# EAGLE board Gambar teknik relay_Rizqulloh faathir akmal Yuliandi_21507334006 (EAGLE 9.6.2)
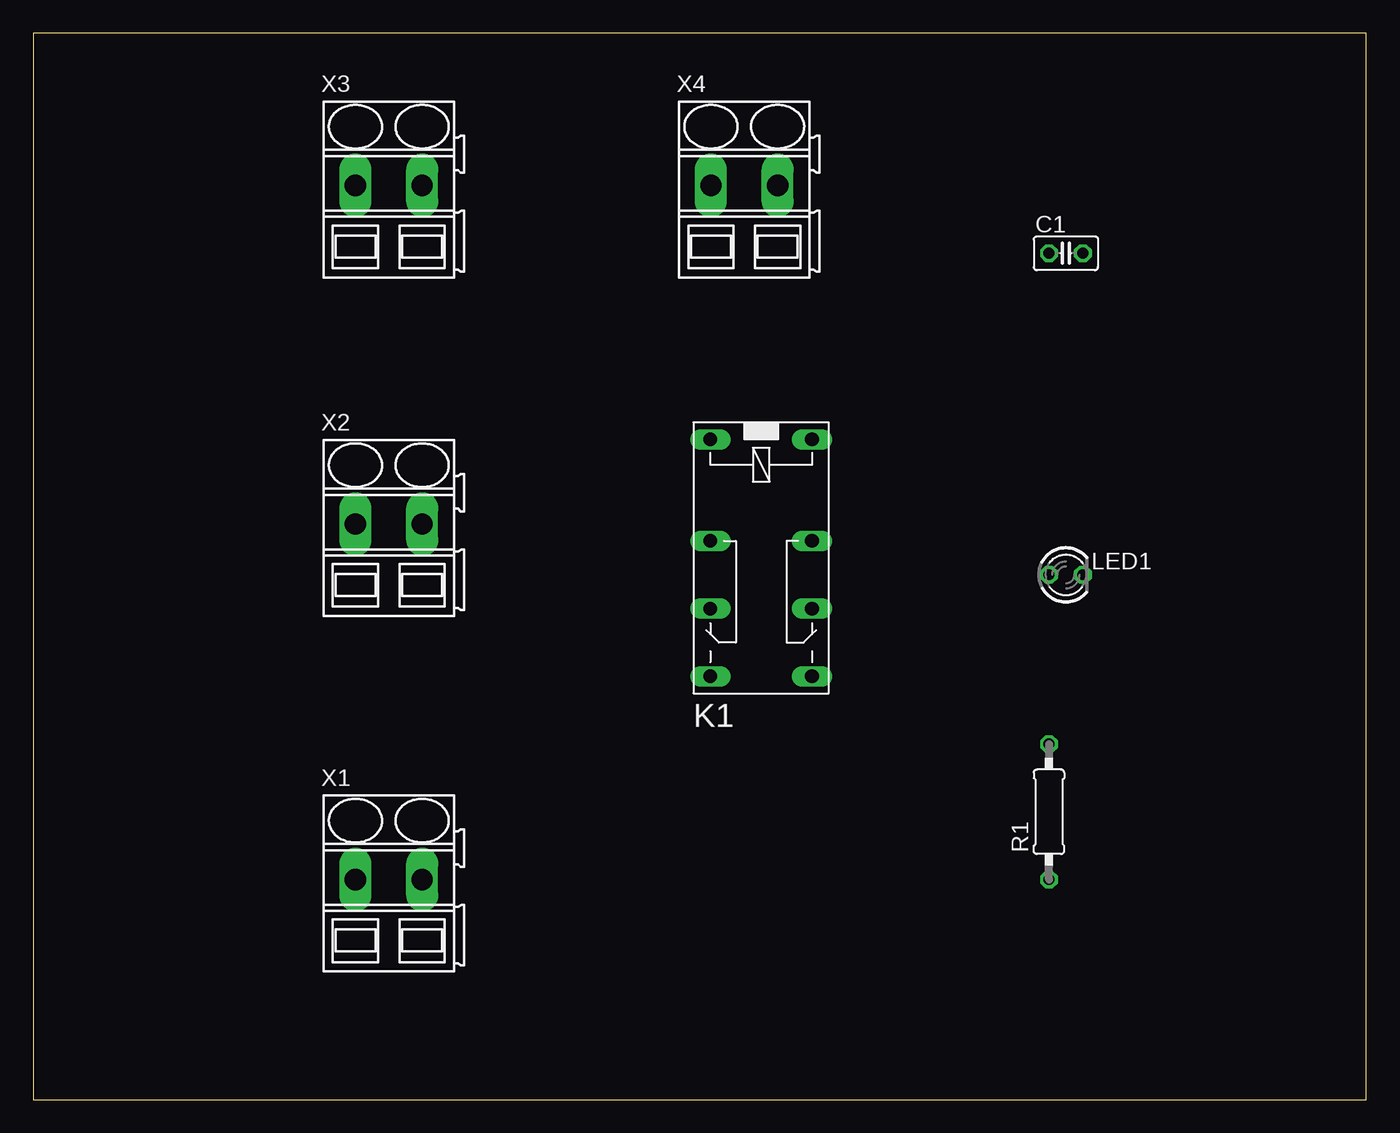
[diagram p0: board, top side]
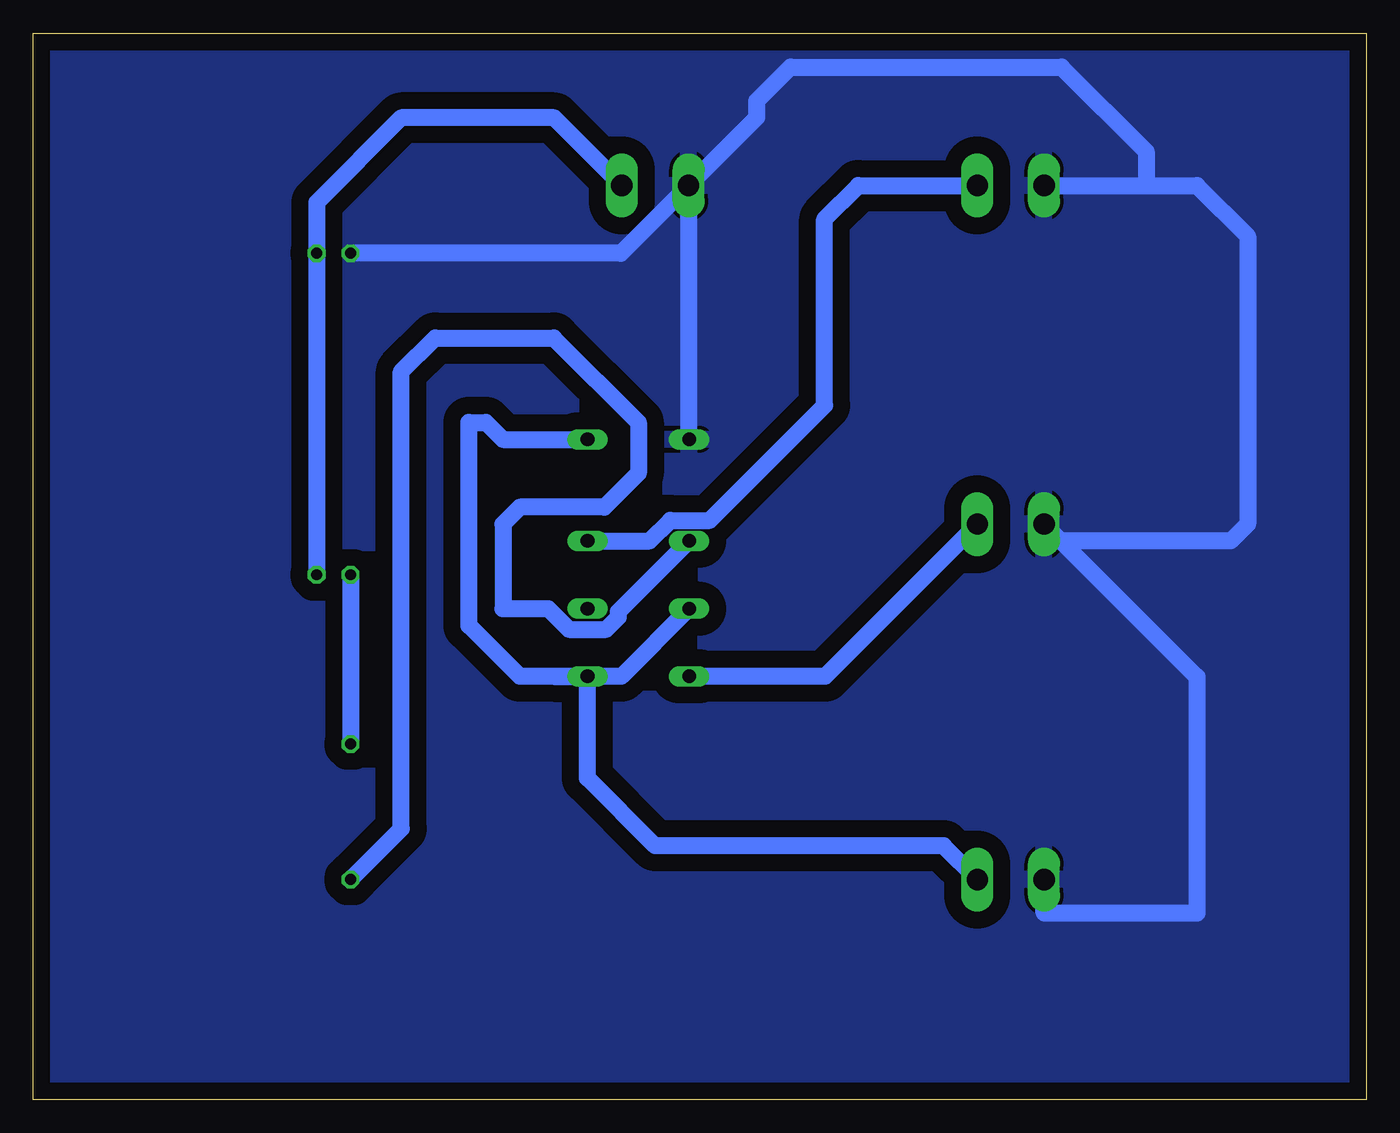
[diagram p1: board, bottom side, seen from below]

Size 100 x 80 mm. Coordinates in mm from the lower left corner, seen from the top.
Outline: 0,0 100,0 100,80 0,80 0,0
Copper layers (1*16): Top 0.035mm / dielectric 1.5mm / Bottom 0.035mm
Design rules "default": minimum track width 6mil, minimum drill 0.35mm, track to track 6mil, track to pad 6mil, pad to pad 6mil, via to via 6mil, smd to smd 6mil, copper to edge 40mil, drill to drill 6mil, minimum pad ring 10mil, minimum via ring 8mil, stop-mask expansion 4mil, vias tented up to drill 0mil, thermal gap 10mil

## Footprints (pad centres in the part's own frame; a part is rotated, then mirrored left to right if it is on the bottom)
C025-025X050 = drill 0.813 octagon: 1 -1.27,0; 2 1.27,0
351 = drill 1.016 long: 1 -3.81,-3.81; 16 -3.81,3.81; O1 8.89,-3.81; O2 8.89,3.81; P1 3.81,-3.81; P2 3.81,3.81; S1 13.97,-3.81; S2 13.97,3.81
LED3MM = drill 0.813 octagon: A -1.27,0; K 1.27,0
0207/10 = drill 0.813 octagon: 1 -5.08,0; 2 5.08,0
SMKDSP_1,5/2 = drill 1.6 pad 1.8 long: 1 -2.5,0; 2 2.5,0

## Placement (x,y rotation side)
C1  [C025-025X050]  77.47,63.5 0 top
K1  351  [351]  54.61,45.72 270 top
LED1  [LED3MM]  77.47,39.37 0 top
R1  [0207/10]  76.2,21.59 90 top
X1  SMKDSP_1,5/2  [SMKDSP_1,5/2]  26.67,16.51 0 top
X2  SMKDSP_1,5/2  [SMKDSP_1,5/2]  26.67,43.18 0 top
X3  SMKDSP_1,5/2  [SMKDSP_1,5/2]  26.67,68.58 0 top
X4  SMKDSP_1,5/2  [SMKDSP_1,5/2]  53.34,68.58 0 top

## Library data of the parts
C1 = rcl; SPICEPREFIX: C
K1 = relay; OC_FARNELL: unknown; OC_NEWARK: unknown
LED1 = led
R1 = rcl; SPICEPREFIX: R
X1-X4 = con-phoenix-smkdsp; MF: FARNELL; MPN: 1733570; OC_FARNELL: 3041244; OC_NEWARK: 69C8588

## Nets
GND: C1.1 K1.1 X1.1 X2.1 X3.1 X4.1
N$1: K1.P1 R1.1
N$2: LED1.A R1.2
O1: K1.S1 X2.2
P2: K1.P2 X3.2
S12: K1.16 K1.O1 K1.S2 X1.2
VOUT: C1.2 LED1.K X4.2

## Tracks (layer width: path | path; a pad name or v marks a point on that pad's centre or on a via)
GND
  Bottom 1.27: X3.1 16.51,68.58 | 16.51,68.58 12.7,68.58 8.89,64.77 8.89,43.18 10.16,41.91 24.13,41.91 24.17,41.95 X2.1 12.7,31.71 12.7,13.97 24.13,13.97 24.17,14.01 X1.1 | X4.1 45.72,73.7 45.72,74.93 43.18,77.47 22.86,77.47 16.51,71.12 16.51,68.58 | X4.1 55.92,63.5 C1.1 | X4.1 50.84,49.57 K1.1
  pour Bottom (isolate 1.27): 0,80.01 100.33,80.01 100.33,0 0,0
N$1
  Bottom 1.27: R1.1 72.39,20.32 72.39,54.61 69.85,57.15 60.96,57.15 54.61,50.8 54.61,46.99 57.15,44.45 63.5,44.45 64.77,43.18 64.77,36.83 61.37,36.83 59.82,35.28 57.02,35.28 56.11,36.19 56.11,36.6 K1.P1
N$2
  Bottom 1.27: LED1.A R1.2
O1
  Bottom 1.27: X2.2 40.6,31.75 K1.S1
P2
  Bottom 1.27: K1.P2 53.75,41.91 52.2,43.46 49.25,43.46 40.64,52.07 40.64,66.04 38.1,68.58 X3.2
S12
  Bottom 1.27: 60.96,31.75 K1.S2 | K1.16 64.77,49.53 66.04,50.8 67.31,50.8 67.31,35.56 63.5,31.75 K1.S2 | X1.2 31.71,19.05 53.34,19.05 58.42,24.13 K1.S2 | K1.O1 55.88,31.75 K1.S2
VOUT
  Bottom 1.27: X4.2 60.92,73.66 72.39,73.66 78.74,67.31 C1.2 LED1.K